# EAGLE board ovms_lilygo_tcall_revA (EAGLE 9.6.2)
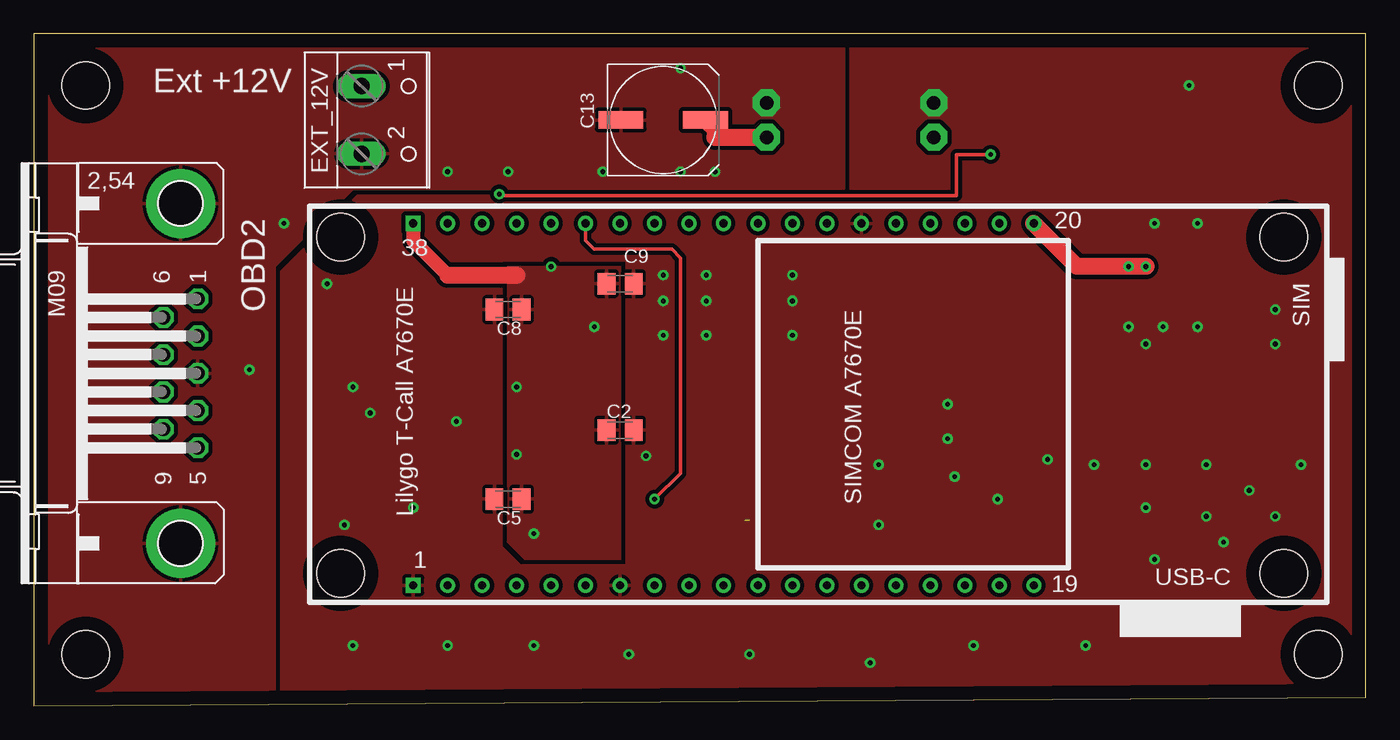
[diagram p0: board, top side]
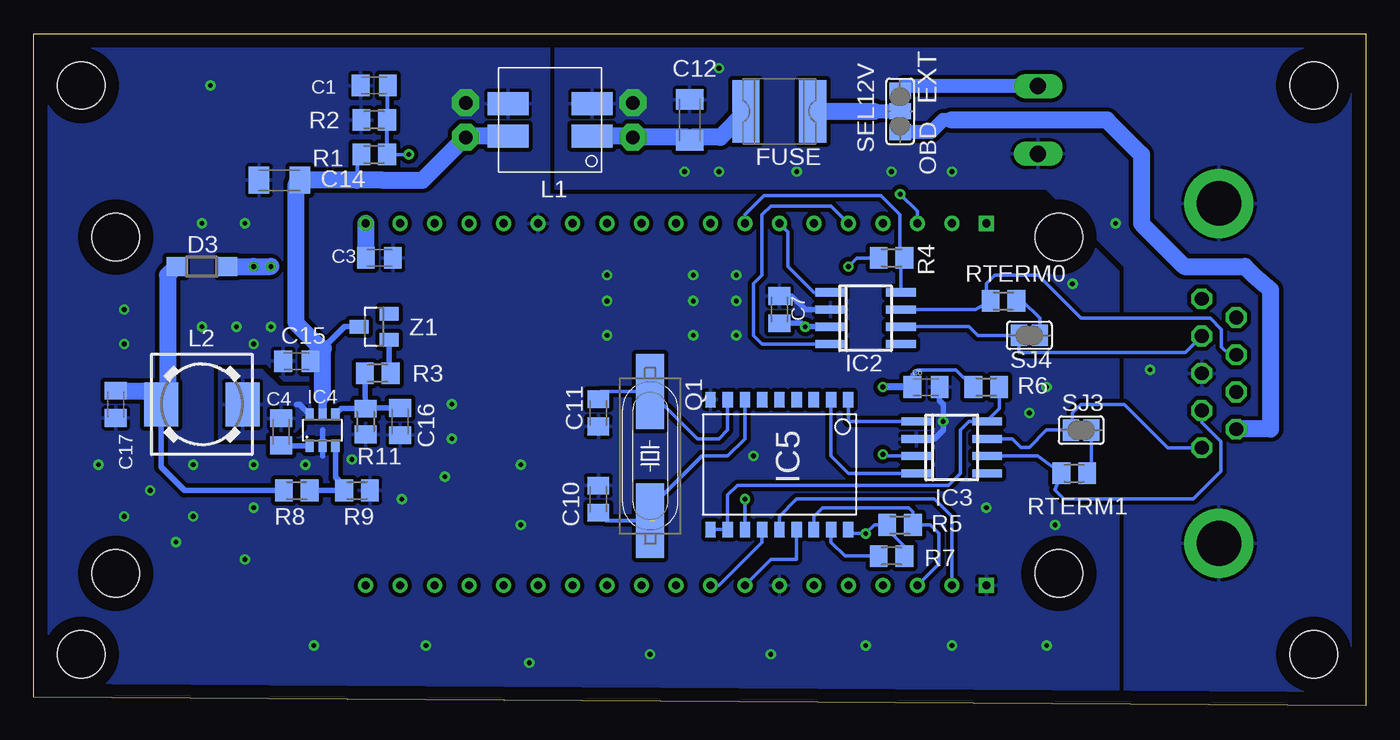
[diagram p1: board, bottom side, seen from below]

Size 98.09 x 49.52 mm. Coordinates in mm from the lower left corner, seen from the top.
Outline: 0,0 98.09,0.64 98.09,49.52 0,49.52 0,0
Copper layers (1*16): Top 0.035mm / dielectric 1.5mm / Bottom 0.035mm
Design rules "default *": minimum track width 6mil, minimum drill 0.35mm, track to track 12mil, track to pad 12mil, pad to pad 12mil, via to via 10mil, smd to smd 12mil, copper to edge 40mil, drill to drill 6mil, minimum pad ring 10mil, minimum via ring 8mil, stop-mask expansion 4mil, vias tented up to drill 0mil, thermal gap 10mil
Holes 3.5 mm at 94.61,45.72 94.61,3.81 3.81,3.81 3.81,45.72

## Footprints (pad centres in the part's own frame; a part is rotated, then mirrored left to right if it is on the bottom)
C0805K = smd 1.3 x 1.6: 1 -1,0; 2 1,0
C1206K = smd 1.5 x 2: 1 -1.5,0; 2 1.5,0
UD-8X10_NICHICON = smd 3.3 x 1.3: + 3.125,0; - -3.125,0
SOD123 = smd 1.4 x 1.4: A 1.9,0; C -1.9,0
W237-102 = drill 1.194 long: 1 -2.5,-1.27; 2 2.5,-1.27
MF-SMDF050 = smd 2 x 4.6: 1 -2.45,0; 2 2.45,0
SO-08 = smd 0.6 x 2.2: 1 -1.905,-2.6; 2 -0.635,-2.6; 3 0.635,-2.6; 4 1.905,-2.6; 5 1.905,2.6; 6 0.635,2.6; 7 -0.635,2.6; 8 -1.905,2.6
SOT23-6 = smd 0.6 x 0.9: 1 -0.95,-1.15; 2 0,-1.15; 3 0.95,-1.15; 4 0.95,1.15; 5 0,1.15; 6 -0.95,1.15
SO-18W = smd 0.762 x 1.143: 1 -5.08,-4.788; 2 -3.81,-4.788; 3 -2.54,-4.788; 4 -1.27,-4.788; 5 0,-4.788; 6 1.27,-4.788; 7 2.54,-4.788; 8 3.81,-4.788; 9 5.08,-4.788; 10 5.08,4.788; 11 3.81,4.788; 12 2.54,4.788; 13 1.27,4.788; 14 0,4.788; 15 -1.27,4.788; 16 -2.54,4.788; 17 -3.81,4.788; 18 -5.08,4.788
CHOKE_SMD = smd 1.7 x 3: 1 1.198,-0.72; 2 -1.198,-0.72; 3 -1.198,-6.9; 4 1.198,-6.9
DR74 = smd 2.5 x 3.25: 1 -3,0; 2 3,0
LILYGO-TCALL-A7670E_1.0 = drill 0.6 square: 1 -29.21,-13.97; 38 -29.21,12.7 | drill 0.6: 2 -26.67,-13.97; 3 -24.13,-13.97; 4 -21.59,-13.97; 5 -19.05,-13.97; 6 -16.51,-13.97; 7 -13.97,-13.97; 8 -11.43,-13.97; 9 -8.89,-13.97; 10 -6.35,-13.97; 11 -3.81,-13.97; 12 -1.27,-13.97; 13 1.27,-13.97; 14 3.81,-13.97; 15 6.35,-13.97; 16 8.89,-13.97; 17 11.43,-13.97; 18 13.97,-13.97; 19 16.51,-13.97; 20 16.51,12.7; 21 13.97,12.7; 22 11.43,12.7; 23 8.89,12.7; 24 6.35,12.7; 25 3.81,12.7; 26 1.27,12.7; 27 -1.27,12.7; 28 -3.81,12.7; 29 -6.35,12.7; 30 -8.89,12.7; 31 -11.43,12.7; 32 -13.97,12.7; 33 -16.51,12.7; 34 -19.05,12.7; 35 -21.59,12.7; 36 -24.13,12.7; 37 -26.67,12.7 | hole 3.5: -34.544,11.684; -34.544,-13.081; 34.925,-13.081; 34.925,11.684
M09HP = drill 1.016 octagon: 1 -5.486,1.27; 2 -2.743,1.27; 3 0,1.27; 4 2.743,1.27; 5 5.486,1.27; 6 -4.115,-1.27; 7 -1.372,-1.27; 8 1.372,-1.27; 9 4.115,-1.27 | drill 3.302 pad 5.08: G1 -12.522,0; G2 12.522,0
11.4X4.5 = smd 5.5 x 2.08: 1 -4.75,0; 2 4.75,0
M0805 = smd 1.3 x 1.6: 1 -0.95,0; 2 0.95,0
SJ_2 = smd 1.168 x 1.6: 1 -1.524,0; 2 0,0; 3 1.524,0
SJ = smd 1.168 x 1.6: 1 -0.762,0; 2 0.762,0
SOT23 = smd 1 x 1.4: 1 -0.95,-1.1; 2 0.95,-1.1; 3 0,1.1

## Placement (x,y rotation side)
C1  100n  [C0805K]  73.03,45.72 180 bottom
C2  1u  [C0805K]  43.18,20.32 0 top
C3  22u  [C0805K]  72.64,33.02 0 bottom
C4  100n  [C0805K]  79.88,20.19 270 bottom
C5  100n  [C0805K]  34.92,15.24 180 top
C6  100n  [C0805K]  32.38,23.5 0 bottom
C7  100n  [C0805K]  43.18,29.21 270 bottom
C8  1u  [C0805K]  34.92,29.21 180 top
C9  1u  [C0805K]  43.18,31.11 0 top
C10  22pF  [C0805K]  56.52,15.24 270 bottom
C11  22pF  [C0805K]  56.52,21.59 90 bottom
C12  22u  [C1206K]  49.78,43.18 90 bottom
C13  220u  [UD-8X10_NICHICON]  46.35,43.18 0 top
C14  22u  [C1206K]  80.01,38.73 0 bottom
C15  2u2  [C0805K]  78.74,25.4 0 bottom
C16  1u  [C0805K]  71.12,20.95 90 bottom
C17  22u  [C0805K]  92.08,22.23 270 bottom
D3  SS12  [SOD123]  85.72,32.38 180 bottom
EXT_12V  GND  [W237-102]  25.4,43.18 270 top
FUSE  MF-SMDF050  [MF-SMDF050]  43.18,43.81 180 bottom
IC2  SN65HVD233  [SO-08]  36.83,28.57 270 bottom
IC3  SN65HVD233  [SO-08]  30.48,19.05 270 bottom
IC4  LMR516XX  [SOT23-6]  76.83,20.32 0 bottom
IC5  MCP2515  [SO-18W]  43.18,17.78 180 bottom
L1  WE-SL2 250uH,1.2A  [CHOKE_SMD]  56.26,43.18 270 bottom
L2  33u  [DR74]  85.72,22.23 180 bottom
LILYGO  LILYGO-T-CALL-A7670E_1.0SIMCOMTOP  [LILYGO-TCALL-A7670E_1.0]  57.15,22.86 0 top
OBD2  [M09HP]  10.79,24.51 270 top
Q1  X49SM16MSD2SC  [11.4X4.5]  52.7,18.41 270 bottom
R1  470k  [M0805]  73.03,40.64 180 bottom
R2  100k  [M0805]  73.03,43.18 0 bottom
R3  100k  [M0805]  72.77,24.51 0 bottom
R4  10k  [M0805]  34.92,33.02 180 bottom
R5  10K  [M0805]  34.29,13.34 180 bottom
R6  10K  [M0805]  27.94,23.5 180 bottom
R7  10K  [M0805]  34.92,11.05 0 bottom
R8  100k  [M0805]  78.74,15.88 180 bottom
R9  20k  [M0805]  74.3,15.88 180 bottom
R11  220k  [M0805]  73.66,20.95 90 bottom
RTERM0  120  [M0805]  26.67,29.84 180 bottom
RTERM1  120  [M0805]  21.46,17.14 180 bottom
SEL12V  [SJ_2]  34.29,43.81 270 bottom
SJ3  [SJ]  20.95,20.32 180 bottom
SJ4  [SJ]  24.77,27.3 180 bottom
Z1  10V  [SOT23]  73.03,27.94 90 bottom

## Library data of the parts
C1-C17 = rcl; SPICEPREFIX: C
D3 = diode
EXT_12V = con-wago-500; MPN: 237-102; OC_FARNELL: unknown; OC_NEWARK: 70K9898; VIN: 12V
FUSE IC2-IC4 LILYGO Z1 = ovms_lilygo
IC5 = microchip
L1 = ovms_lilygo; OC_FARNELL: unknown; OC_NEWARK: unknown
L2 = inductors; SPICEPREFIX: L
OBD2 = con-subd; OC_FARNELL: unknown; OC_NEWARK: unknown
Q1 = crystal-geyer_V1_0
R1-R9 R11 RTERM0 RTERM1 = rcl; SPICEPREFIX: R
SEL12V SJ3 SJ4 = jumper

## Nets
12V: C12.1 C13.+ FUSE.2 L1.1
CB: C4.2 IC4.1
EN: C16.2 IC4.4 R3.1 R11.2
EXT12V: EXT_12V.1 SEL12V.1
FB: IC4.3 R8.1 R9.2
GND: C1.2 C2.2 C3.2 C5.2 C6.2 C7.1 C8.2 C9.2 C10.1 C11.1 C14.1 C15.1 C16.1 C17.2 IC2.2 IC3.2 IC4.2 IC5.9 L1.3 LILYGO.1 LILYGO.7 LILYGO.25 R2.1 R9.1 R11.1
GND1: C12.2 C13.- EXT_12V.2 L1.2 OBD2.3 OBD2.G1 OBD2.G2
N$1: IC3.1 IC5.1
N$2: FUSE.1 SEL12V.2
N$3: IC3.4 IC5.2
N$4: IC5.17 R7.1
N$5: IC5.16 LILYGO.3 R5.1
N$6: IC3.8 IC5.10 IC5.11 R6.1
N$7: C10.2 IC5.7 Q1.2
N$8: R3.2 Z1.1
N$9: IC2.4 LILYGO.34
N$10: IC2.1 LILYGO.32
N$11: IC2.6 OBD2.2 SJ4.2
N$15: IC2.8 LILYGO.31 R4.1
N$16: IC2.7 OBD2.7 RTERM0.2
N$17: IC3.6 OBD2.4 RTERM1.2
N$18: IC3.7 OBD2.5 SJ3.2
N$21: C1.1 LILYGO.36 R1.1 R2.2
N$28: IC5.12 LILYGO.33
N$30: C11.2 IC5.8 Q1.1
N$32: IC5.13 LILYGO.9
N$33: IC5.15 LILYGO.8
N$34: IC5.14 LILYGO.2
N$38: RTERM1.1 SJ3.1
N$39: RTERM0.1 SJ4.1
OBD12V: OBD2.9 SEL12V.3
SW: C4.1 IC4.6 L2.1
VCC5V: C3.1 D3.C LILYGO.20
VDD3V3: C2.1 C5.1 C6.1 C7.2 C8.1 C9.1 IC2.3 IC3.3 IC5.18 LILYGO.38 R4.2 R5.2 R6.2 R7.2
VIN12V: C14.2 C15.2 IC4.5 L1.4 R1.2 Z1.3
VOUT: C17.1 D3.A L2.2 R8.2

## Tracks (layer width: path | path; a pad name or v marks a point on that pad's centre or on a via)
12V  (via drill 1 pad 2)
  Top 1.27: C13.+ 50.16,42.49 50.16,41.91 v53.98,41.91
  Bottom 1.27: FUSE.2 47.53,41.91 49.65,41.91 C12.1 49.91,41.91 v53.98,41.91 54.05,41.98 L1.1
CB
  Bottom 0.406: IC4.1 79.86,19.17 C4.2
EN
  Bottom 0.406: 73.61,21.95 R11.2 75.45,21.91 IC4.4 | 73.61,21.95 C16.2 | R3.1 73.66,22 73.61,21.95
EXT12V
  Bottom 1.016: EXT_12V.1 33.95,45.68 SEL12V.1
  Bottom 1.27: EXT_12V.1 24.17,45.72
FB
  Bottom 0.406: R8.1 R9.2 74.93,15.88 75.89,16.83 IC4.3
GND  (via drill 0.35, 1 pad 2)
  Bottom 0.406: IC2.2 41.27,29.21 42.27,30.21 C7.1 | C6.2 31.39,22.5 31.11,22.23 31.11,20.32 31.75,19.68 IC3.2 | 76.83,18.41 IC4.2 76.83,20.32
  other vias: 23.5,4.45 30.48,4.45 36.83,4.45 43.81,3.81 52.7,3.81 61.59,3.17 69.22,4.45 77.47,4.45 22.86,13.34 21.59,31.11 62.23,17.78 45.09,18.41 62.23,13.34 82.55,10.79 87.63,12.06 83.19,27.94 85.09,45.72 31.11,20.95 66.29,44.45 23.5,23.5 24.77,21.59 27.94,14.61 46.35,31.75 46.35,29.84 46.35,27.3 49.53,31.75 49.53,29.84 49.53,27.3 55.88,31.75 55.88,29.84 55.88,27.3 81.92,17.78 81.92,26.67 78.11,17.78 86.36,17.78 74.68,18.16 70.99,15.24 67.82,16.89 67.31,19.68 67.31,22.23 85.72,27.94 82.55,35.56 80.64,27.94 85.72,35.56 86.36,13.97 81.92,14.61 93.34,17.78 89.53,15.88 91.44,13.97 91.44,26.67 91.44,29.21
  pour Top (rank 2): 0.64,49.53 97.79,49.53 97.79,0.64 0,0.64 0,48.9
  pour Bottom (rank 2): 0.64,49.53 0.64,0.64 97.79,0.64 97.79,49.53
GND1  (via drill 0.35, 1 pad 2)
  other vias: 15.88,24.77 18.41,35.56 47.62,46.99 47.62,39.37 50.16,39.37 41.91,39.37 34.92,39.37 30.48,39.37 53.98,44.45
  pour Top (isolate 0.254): 0.64,49.53 0.64,0.64 17.78,0.64 17.78,32.38 23.5,38.1 59.69,38.1 59.69,49.53
  pour Bottom: 0.64,0.64 17.78,0.64 17.78,32.38 23.5,38.1 59.69,38.1 59.69,49.53 1.27,49.53 0.64,48.9
N$1
  Bottom 0.254: IC3.1 38.1,20.95 IC5.1
N$2
  Bottom 1.016: 36.19,43.81 SEL12V.2
  Bottom 1.27: FUSE.1 36.19,43.81
N$3
  Bottom 0.254: IC3.4 38.1,17.14 39.37,18.41 IC5.2
N$4
  Bottom 0.254: 35.56,11.36 R7.1 38.35,11.05 39.37,12.06 IC5.17
N$5
  Bottom 0.254: IC5.16 40.64,13.97 40.01,14.61 33.66,14.61 33.34,14.29 R5.1 32.07,13.34 31.43,12.7 31.43,10.47 LILYGO.3
N$6
  Bottom 0.254: IC5.10 IC5.11 46.99,15.53 46.27,16.26 30.73,16.26 29.84,17.14 29.84,20.32 29.21,20.95 27.94,20.95 | IC3.8 27.94,20.95 | R6.1 26.99,21.91 27.94,20.95
N$7  (1 unrouted)
  Bottom 0.152: 52.38,13.66 52.07,13.97
  Bottom 0.254: IC5.7 45.72,19.68 46.99,18.41 48.9,18.41
  Bottom 0.305: 56.12,13.84 C10.2 55.94,13.66 Q1.2 52.7,14.61 48.9,18.41
N$8
  Bottom 0.406: Z1.1 71.92,24.61 R3.2
N$9
  Bottom 0.254: IC2.4 44.45,26.67 45.09,27.3 45.09,31.11 44.45,31.75 44.45,36.2 43.81,36.83 39.37,36.83 LILYGO.34
N$10
  Bottom 0.254: IC2.1 40.64,30.48 42.55,32.38 42.55,34.92 LILYGO.32
N$11
  Bottom 0.254: SJ4.2 28.57,27.3 29.21,27.94 IC2.6 | SJ4.2 25.4,27.18 | SJ4.2 25.53,26.04 13.28,26.04 OBD2.2
N$15
  Bottom 0.254: IC2.8 34.23,32.77 R4.1 33.98,33.34 34.29,33.66 34.29,36.2 35.69,37.59 44.32,37.59 45.72,36.2 LILYGO.31
N$16
  Bottom 0.254: IC2.7 28.73,29.21 RTERM0.2 27.94,30 27.94,31.11 27.3,31.75 24.13,31.75 20.95,28.57 11.44,28.57 10.62,27.75 10.62,26.47 10.03,25.88 OBD2.7
N$17
  Bottom 0.254: IC3.6 24.16,18.41 RTERM1.2 22.89,15.9 22.23,15.24 12.7,15.24 10.67,17.27 10.67,19.48 12.06,20.88 OBD2.4
N$18
  Bottom 0.254: SJ3.2 23.5,20.32 24.77,19.05 25.4,19.05 26.04,19.68 IC3.7 | SJ3.2 21.21,19.81 | SJ3.2 21.59,20.45 21.59,21.59 20.95,22.23 17.78,22.23 14.58,19.02 OBD2.5
N$21  (via drill 0.35)
  Top 0.254: v70.48,40.64 67.94,40.64 67.94,37.59 34.42,37.59 v34.29,37.72
  Bottom 0.254: v70.48,40.64 R1.1 | v34.29,37.72 33.02,36.45 LILYGO.36
  Bottom 0.305: R1.1 R2.2 72.03,43.23 C1.1
N$28  (via drill 0.35)
  Top 0.254: LILYGO.33 40.64,34.29 41.27,33.66 46.99,33.66 47.62,33.02 47.62,17.14 v45.72,15.24
  Bottom 0.254: 45.72,12.7 IC5.12 v45.72,15.24
N$30
  Bottom 0.254: IC5.8 46.99,20.32 47.62,19.68 49.23,19.68 Q1.1 56.34,23.16 C11.2
N$32
  Bottom 0.254: IC5.13 44.45,12.06 47.62,8.89 LILYGO.9
N$33
  Bottom 0.254: IC5.15 41.91,10.79 43.81,10.79 LILYGO.8
N$34
  Bottom 0.254: IC5.14 43.18,13.97 41.91,15.24 31.75,15.24 30.48,13.97 LILYGO.2
N$38
  Bottom 0.254: SJ3.1 20.19,17.3 RTERM1.1
N$39
  Bottom 0.254: RTERM0.1 25.27,29.84 24,28.57 SJ4.1
OBD12V
  Bottom 1.016: 30.5,43.17 31.12,43.17 32,42.29 SEL12V.3
  Bottom 1.27: OBD2.9 6.99,20.4 6.99,30.65 8.26,31.75 8.89,32.38 13.34,32.38 16.51,35.56 16.51,40.64 19.04,43.17 30.5,43.17
SW
  Bottom 0.406: IC4.6 78.54,22.23 78.74,22.23
  pour Bottom: 77.47,23.5 77.47,21.59 79.38,19.68 84.45,19.68 84.45,24.77 81.28,24.77 80.01,23.5
VCC5V  (via drill 0.35)
  Top 1.27: v81.92,32.38 76.83,32.38 LILYGO.20
  Bottom 1.27: LILYGO.20 C3.1 | D3.C v81.92,32.38 v80.64,32.38
VDD3V3  (via drill 0.35)
  Top 1.016: LILYGO.38 27.94,34.29 30.48,31.75
  Top 1.27: 30.48,31.75 35.56,31.75
  Bottom 0.254: IC3.3 35.44,18.41 v35.56,18.54 | R4.2 37.47,33.02 v38.1,32.38 | R5.2 35.56,13.34 | 35.56,13.34 36.2,13.34 v36.83,12.7 37.81,12.7 IC5.18 | R7.2 33.98,11.75 35.56,13.34 | R6.2 30.16,24.77 33.02,24.77 33.38,24.4
  Bottom 0.305: 33.38,24.4 C6.1
  Bottom 0.406: IC2.3 v41.27,27.94 41.55,28.21 C7.2
  Bottom 0.508: C6.1 v35.56,23.5
  pour Top: 43.18,32.38 43.18,10.79 36.2,10.79 34.92,12.06 34.92,32.38
VIN12V  (via drill 1 pad 2)
  Bottom 0.305: R1.2 74.3,40.32 74.3,38.73
  Bottom 0.406: Z1.3 75.2,27.94 C15.2
  Bottom 0.508: 72.08,39.05 72.39,38.73
  Bottom 0.61: 76.83,22.86 IC4.5
  Bottom 1.27: 76.86,26.28 C15.2 76.79,26.35 | 76.86,26.28 76.86,22.89 76.83,22.86 | 76.86,26.28 78.77,28.18 78.77,38.48 C14.2 74.3,38.73 72.39,38.73 69.47,38.73 v66.29,41.91 66.22,41.98 L1.4
VOUT
  Bottom 0.406: 80.01,15.55 R8.2 87,15.88 88.72,17.61 L2.2
  Bottom 1.27: 88.09,23.11 88.09,22.86 88.26,22.69 | D3.A 88.26,31.75 88.26,22.69 | 88.26,22.69 L2.2 | C17.1 88.8,23.23 88.26,22.69

## Text on the board
tNames: Ext +12V
bNames: EXT | OBD
tCream: Car-Monitor V1.1 / CZ 01-2025